# EAGLE board 7-Segment Display (EAGLE 9.7.0)

Size 188.94 x 62.66 mm. Coordinates in mm from the lower left corner, seen from the top.
Outline: 0,0 188.94,0 188.94,62.66 0,62.66 0,0
Copper layers (1*16): Top 0.035mm / dielectric 1.5mm / Bottom 0.035mm
Design rules "default": minimum track width 6mil, minimum drill 0.35mm, track to track 6mil, track to pad 6mil, pad to pad 6mil, via to via 6mil, smd to smd 6mil, copper to edge 40mil, drill to drill 6mil, minimum pad ring 10mil, minimum via ring 8mil, stop-mask expansion 4mil, vias tented up to drill 0mil, thermal gap 10mil

## Footprints (pad centres in the part's own frame; a part is rotated, then mirrored left to right if it is on the bottom)
7SEG-13 = drill 0.813 long: 1 -5.08,-7.62; 2 -2.54,-7.62; 3 0,-7.62; 4 2.54,-7.62; 5 5.08,-7.62; 6 5.08,7.62; 7 2.54,7.62; 8 0,7.62; 9 -2.54,7.62; 10 -5.08,7.62
BATTERY-GENERIC = drill 1.118 pad 3.15 octagon: + 2.54,0; - -2.54,0
RESAD1016W63L850D250B = drill 0.83 pad 1.43: 1 -5.08,0; 2 5.08,0
GL5528 = drill 0.8 pad 1.4: 1 -1.702,0; 2 1.702,0
DIP762W53P254L1969H508Q16B = drill 0.743 pad 1.343: 1 -3.81,8.89; 2 -3.81,6.35; 3 -3.81,3.81; 4 -3.81,1.27; 5 -3.81,-1.27; 6 -3.81,-3.81; 7 -3.81,-6.35; 8 -3.81,-8.89; 9 3.81,-8.89; 10 3.81,-6.35; 11 3.81,-3.81; 12 3.81,-1.27; 13 3.81,1.27; 14 3.81,3.81; 15 3.81,6.35; 16 3.81,8.89
DIP762W53P254L1969H508Q14B = drill 0.743 pad 1.343: 1 -3.81,7.62; 2 -3.81,5.08; 3 -3.81,2.54; 4 -3.81,0; 5 -3.81,-2.54; 6 -3.81,-5.08; 7 -3.81,-7.62; 8 3.81,-7.62; 9 3.81,-5.08; 10 3.81,-2.54; 11 3.81,0; 12 3.81,2.54; 13 3.81,5.08; 14 3.81,7.62

## Placement (x,y rotation side)
DIGIT1  7SEG-CK  [7SEG-13]  141.6,24.21 0 top
P1  BATTERYGENERIC  [BATTERY-GENERIC]  180.68,54.4 180 top
R1  1k  [RESAD1016W63L850D250B]  141.6,44.53 90 top
R2  PHOTOCELL_GL5528  [GL5528]  5.71,34.37 0 top
R3  1k  [RESAD1016W63L850D250B]  6.99,8.97 90 top
U1  CD4511_PDIP  [DIP762W53P254L1969H508Q16B]  87,25.48 90 top
U2  74HC93_PDIP  [DIP762W53P254L1969H508Q14B]  37.47,25.48 90 top

## Library data of the parts
DIGIT1 = Tinkercad; CATEGORY: Opto-Electronic; SUB-CATEGORY: Display; TYPE: 7-Segment
P1 R1-R3 U1 U2 = Tinkercad

## Nets
DIGIT1_CK2: DIGIT1.8 R1.1
P1+: P1.+ R2.1 U1.3 U1.4 U1.16 U2.5
P1-: P1.- R1.2 R3.1 U1.5 U1.8 U2.2 U2.3 U2.10
U1_A: DIGIT1.7 U1.13
U1_B: DIGIT1.6 U1.12
U1_C: DIGIT1.4 U1.11
U1_D: DIGIT1.2 U1.10
U1_E: DIGIT1.1 U1.9
U1_F: DIGIT1.9 U1.15
U1_G: DIGIT1.10 U1.14
U2_!CP0: R2.2 R3.2 U2.14
U2_!CP1: U1.7 U2.1 U2.12
U2_Q1: U1.1 U2.9
U2_Q2: U1.2 U2.8
U2_Q3: U1.6 U2.11

## Tracks (layer width: path | path; a pad name or v marks a point on that pad's centre or on a via)
DIGIT1_CK2  (1 unrouted)
P1+  (5 unrouted)
P1-  (7 unrouted)
U1_A  (1 unrouted)
U1_B  (1 unrouted)
U1_C  (1 unrouted)
U1_D  (1 unrouted)
U1_E  (1 unrouted)
U1_F  (1 unrouted)
U1_G  (1 unrouted)
U2_!CP0  (2 unrouted)
U2_!CP1  (2 unrouted)
U2_Q1  (1 unrouted)
U2_Q2  (1 unrouted)
U2_Q3  (1 unrouted)